# Altium PCB Circadian2-RevA.PcbDoc
Units mm, origin at the board's own origin, x right, y up, seen from the top; angles counter-clockwise.
Board outline 28 x 60 mm, 2 copper layers (Top Layer, Bottom Layer); 28 components, 27 nets, 66 pads, 0 vias.
Unrouted connection lines stored in the file: 8.
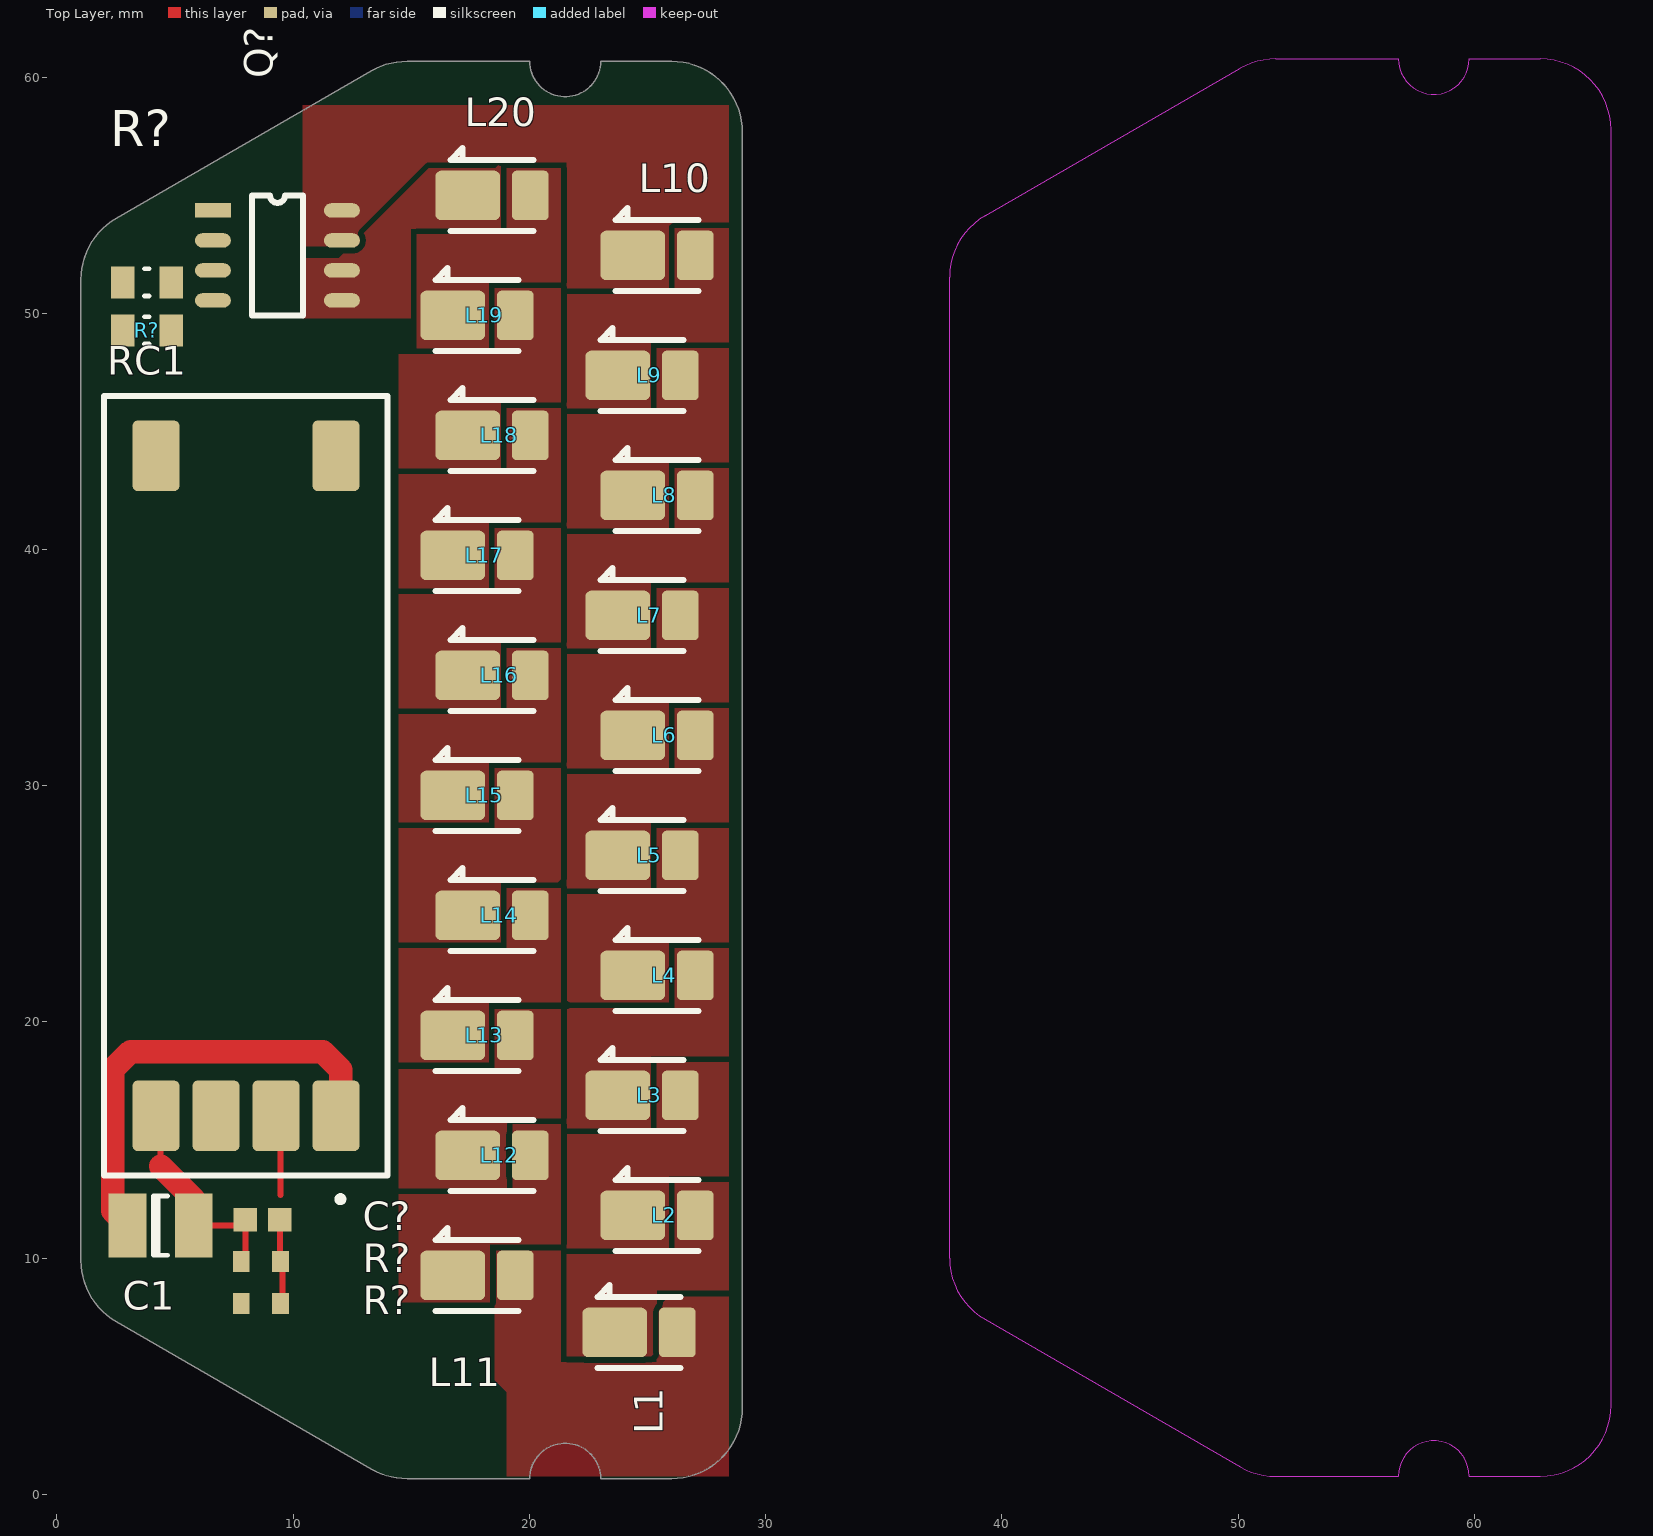
[diagram p0: Top Layer view]
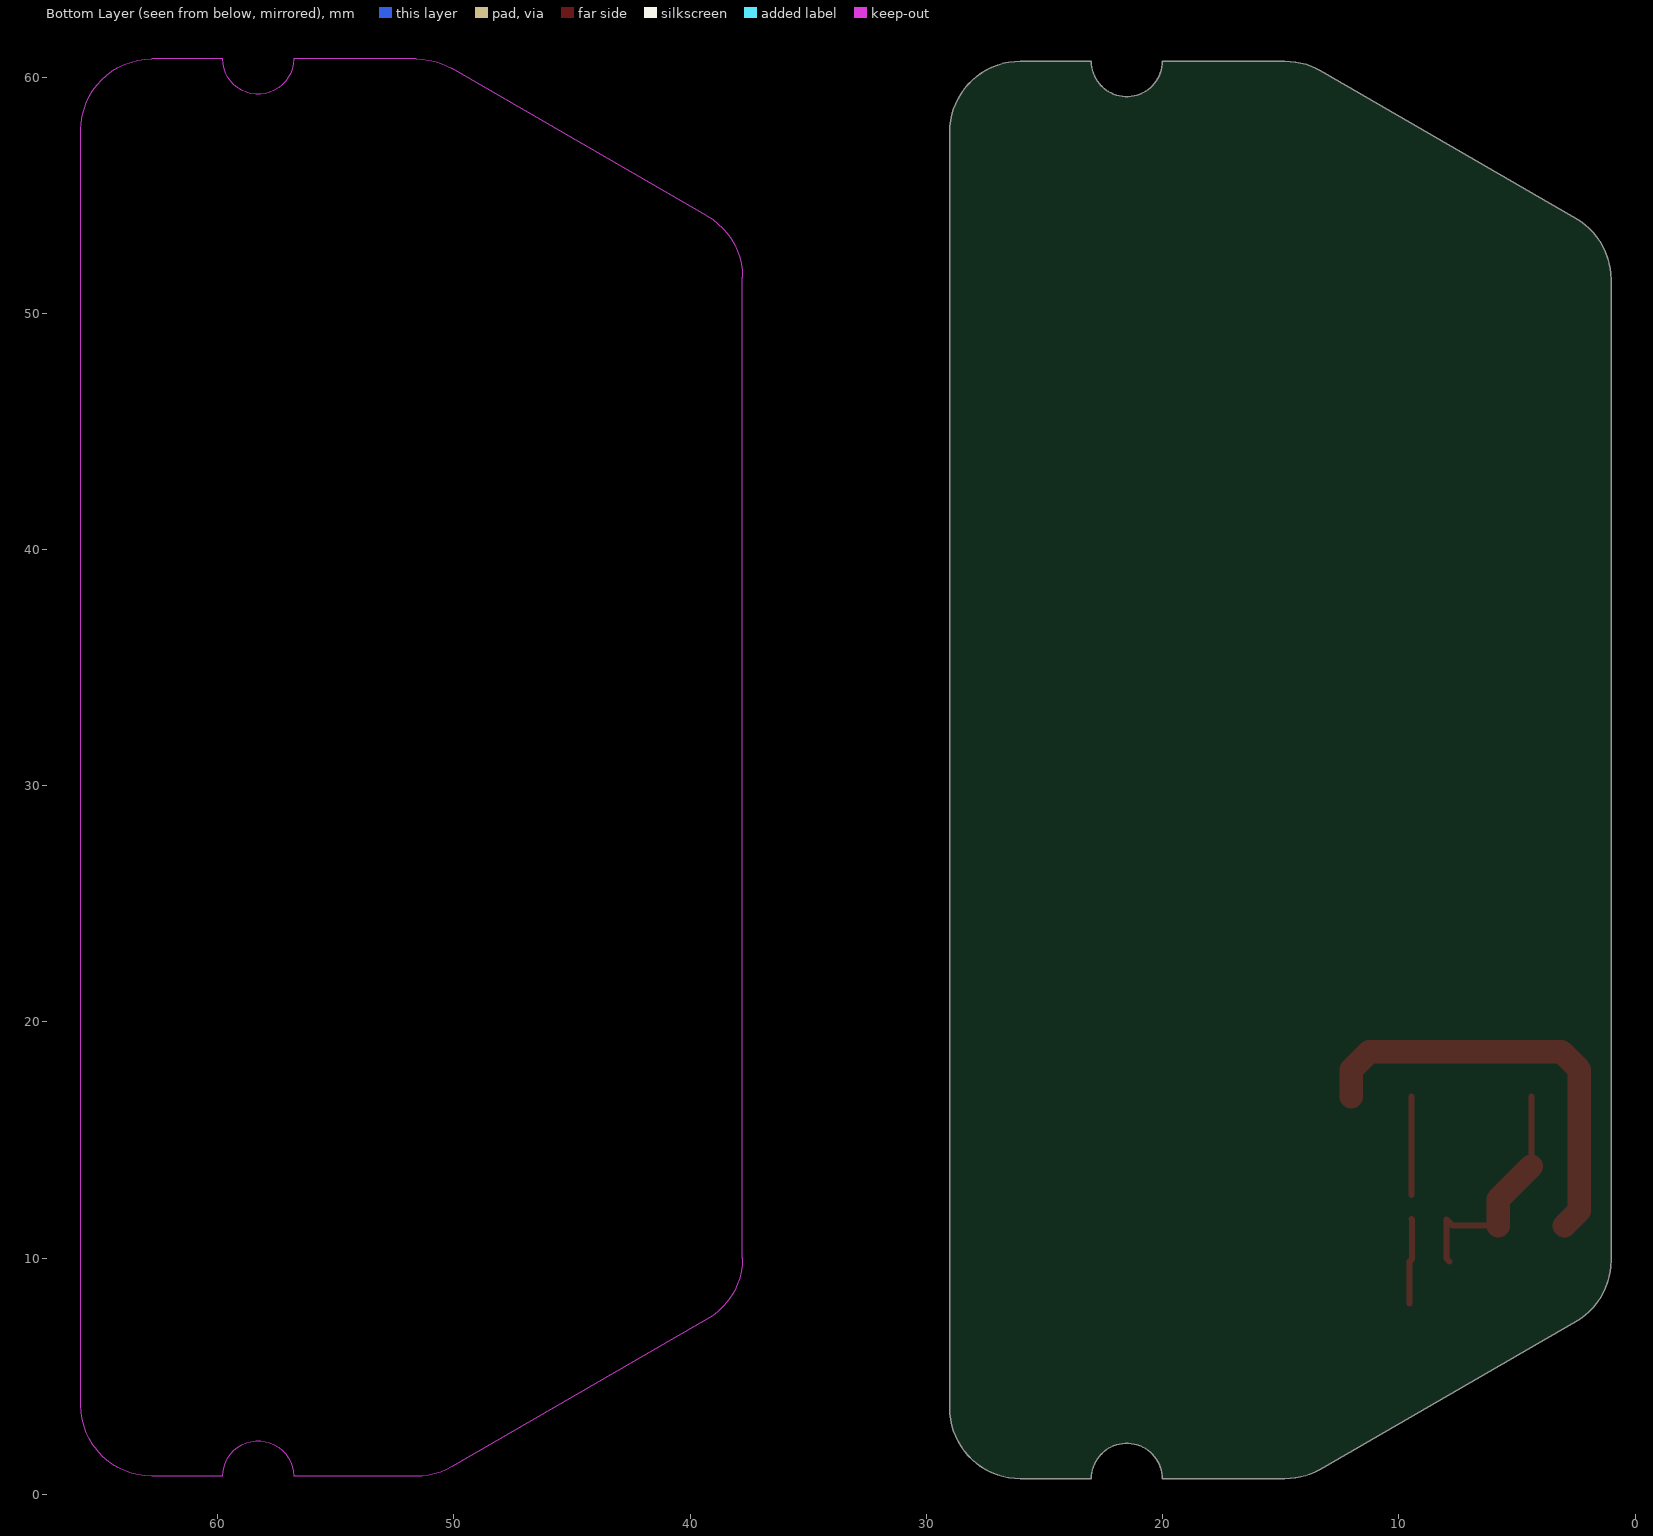
[diagram p1: Bottom Layer view, seen from below]
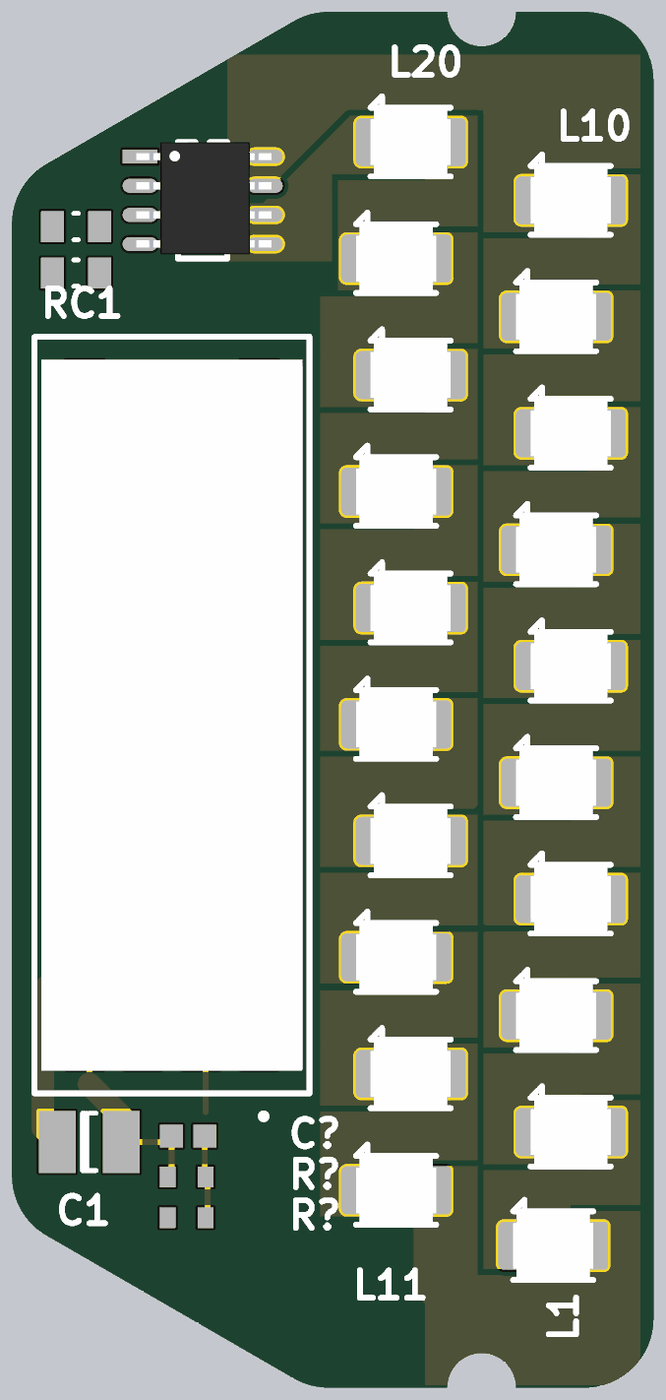
[diagram p2: 3D render of the assembled board from above, using the file's embedded part models]

## Layer stack, top to bottom
Top Solder: solder mask 0.0102, Solder Resist, Dk 3.5
Top Layer: signal copper 0.0356
Dielectric 1: dielectric 0.32, FR-4, Dk 4.8
Bottom Layer: signal copper 0.0356
Bottom Solder: solder mask 0.0102, Solder Resist, Dk 3.5

## Board outline
1.016,9.906 ccw(c4.016,9.906) 2.516,7.308 13.32,1.07 ccw(c14.82,3.668) 14.82,0.668 20.016,0.668 cw(c21.516,0.668) 23.016,0.668 26.016,0.668 ccw(c26.016,3.668) 29.016,3.668 29.016,57.668 ccw(c26.016,57.668) 26.016,60.668 23.016,60.668 cw(c21.516,60.668) 20.016,60.668 14.82,60.668 ccw(c14.82,57.668) 13.32,60.266 2.516,54.029 ccw(c4.016,51.431) 1.016,51.431

## Design rules (kind name [scope] priority, off if disabled: settings)
Clearance [All] p1: gap=0.254
PolygonConnect [All] p1: connectstyle=Direct reliefconductorwidth=0.254 reliefentries=4 polygonreliefangle="90 Angle" airgapwidth=0.254
RoutingVias [All] p1: holewidth=0.711 width=1.27 viastyle="Through Hole" minholewidth=0.711 minwidth=1.27 maxholewidth=0.711 maxwidth=1.27
SolderMaskExpansion [All] p1: expansion=0.102
Width [All] p1: maxlimit=1 minlimit=0.152 preferedwidth=0.254
30 further rules are at their usual default settings.

## Components (designator, comment, footprint, x,y, rotation, side; value= is the part's Value field where it differs from the comment)
C1 "C1210" 1210 4.387,11.382 r0 top
C? "100nF" CAP_SM0603_YAGEOCC2_N 8.705,11.636 r180 top
L1 "GW JTLPS1" E2835 24.638,6.858 r0 top
L2 "GW JTLPS1" E2835 25.4,11.811 r0 top
L3 "GW JTLPS1" E2835 24.765,16.891 r0 top
L4 "GW JTLPS1" E2835 25.4,21.971 r0 top
L5 "GW JTLPS1" E2835 24.765,27.051 r0 top
L6 "GW JTLPS1" E2835 25.4,32.131 r0 top
L7 "GW JTLPS1" E2835 24.765,37.211 r0 top
L8 "GW JTLPS1" E2835 25.4,42.291 r0 top
L9 "GW JTLPS1" E2835 24.765,47.371 r0 top
L10 "GW JTLPS1" E2835 25.4,52.451 r0 top
L11 "GW JTLPS1" E2835 17.78,9.271 r0 top
L12 "GW JTLPS1" E2835 18.415,14.351 r0 top
L13 "GW JTLPS1" E2835 17.78,19.431 r0 top
L14 "GW JTLPS1" E2835 18.415,24.511 r0 top
L15 "GW JTLPS1" E2835 17.78,29.591 r0 top
L16 "GW JTLPS1" E2835 18.415,34.671 r0 top
L17 "GW JTLPS1" E2835 17.78,39.751 r0 top
L18 "GW JTLPS1" E2835 18.415,44.831 r0 top
L19 "GW JTLPS1" E2835 17.78,49.911 r0 top
L20 "GW JTLPS1" E2835 18.415,54.991 r0 top
Q? "NSS40301" SOIC8 6.604,54.356 r0 top
R? "10R" RES_SM0805_YAGEORC_N 3.81,51.308 r0 top
R? "10R" RES_SM0603_YAGEORC_N 8.636,8.08 r180 top
R? "10R" RES_SM0603_YAGEORC_N 8.636,9.858 r0 top
R? "10R" RES_SM0805_YAGEORC_N 3.81,49.276 r0 top
RC1 "RCD-24PL_01" RCD-24PL_01 8,30 r90 top locked

## Footprints (in the part's own frame and the unit in brackets; to place one, negate y for a bottom-side part, rotate by r counter-clockwise, add the part's x,y. Pads: shape width x height; smd on the part's side, far side on the other; paste and mask are expansions set on the pad)
1210 [mm] "Chip Capacitor; Body 3.2 x 2.5 mm (LxW typ)"
  rect 1.6x2.7 smd: 1(-1.4,0) 2(1.4,0)
  silkscreen extent -0.3,-1.25 0.3,1.25
CAP_SM0603_YAGEOCC2_N [mm] "Capacitor, Yageo CC Class2, SM0603, IPC Medium Density"
  rect 1x1 smd: 1(-0.727,0) 2(0.727,0)
  body extent -0.9,-0.5 0.9,0.5, height 0.9
E2835 [mm] "E2835"
  rrect25% 2.75x2.1 smd: 1(-1.025,0)
  rrect25% 1.55x2.1 smd: 2(1.625,0)
  silkscreen extent -1.75,-1.5 1.75,2, body extent -1.75,-1.4 1.75,1.4, height 0.65
RCD-24PL_01 [mm] "Recom LED Driver"
  rrect25% 3x2 smd: 1(-13.97,-3.81) 2(-13.97,-1.27) 3(-13.97,1.27) 4(-13.97,3.81) 5(13.97,-3.81) 6(13.97,3.81)
  silkscreen extent -17.63,-6 16.5,6, body extent -15.5,-5.7 15.5,5.7, height 5.6
RES_SM0603_YAGEORC_N [mm] "Resistor, Yageo RC_L, SM0603, IPC Medium Density"
  rect 0.7x0.9 smd: 1(-0.827,0) 2(0.827,0)
  body extent -0.85,-0.45 0.85,0.45, height 0.55
RES_SM0805_YAGEORC_N [mm] "Resistor, Yageo RC_L, SM0805, IPC Medium Density"
  rect 1x1.35 smd: 1(-1.027,0) 2(1.027,0)
  silkscreen extent -0.1,-0.58 0.1,0.58, body extent -0.7,-0.67 14.39,47.92, height 0.6
SOIC8 [mil]
  rect 60x24 smd: 1(0,0)
  oval 60x24 smd: 2(0,-50) 3(0,-100) 4(0,-150) 5(215,-150) 6(215,-100) 7(215,-50) 8(215,0)
  silkscreen extent 65,-175 150,25, body extent -6,-168 226,25, height 55

## Part data
C1: "Ceramic Chip Capacitor - Standard"
C?: library part CC0603KRX7R9BB104, "CAP 100nF SM0603 X7R 50V YAGEO CC2"
L1 L2 L3 L4 L5 L6 L7 L8 L9 L10 L11 L12 L13 L14 L15 L16 L17 L18 L19 L20: library part "GW JTLPS1.CM LED", "Osram LED"
R? R?: library part RC0805FR-0710RL, "RES 10R SM0805 YAGEO RC_L"
R? R?: library part RC0603FR-0710RL, "RES 10R SM0603 YAGEO RC_L"

## Nets (pads, with @x,y where several pads share a name; then routed paths per layer and width w, separated by ;. In a path a pad name is that pad's centre, name@x,y a point inside that pad or via, vN(x,y) a via of type N, cw(c..) or ccw(c..) an arc to the next point about the centre after c; other vN are vias at no path point)
GND: C1.2 C?.2 R?.1@7.809,9.858 RC1.4 | length 10.2
  Top Layer w0.254: 4.387,13.901 RC1.4@4.387,16.843 ; C1.2 7.724,11.382 C?.2 7.978,9.981 R?.1@7.855,9.858
  Top Layer w1: 4.387,13.901 5.787,12.501 C1.2
LEDVOUT+: L1.2 L11.2 RC1.5
LEDVOUT-: R?.1@2.783,49.276 R?.1@2.783,51.308 RC1.6
NetC?_1: C?.1 R?.1@9.463,8.08 R?.2@9.463,9.858 RC1.2 | length 7.8
  Top Layer w0.254: C?.1@9.467,11.671 C?.1 9.432,9.981 9.555,9.858 R?.1@9.555,8.08 ; 9.467,12.687 RC1.2@9.467,16.843
NetL1_1: L1.1 L2.2
NetL2_1: L2.1 L3.2
NetL3_1: L3.1 L4.2
NetL4_1: L4.1 L5.2
NetL5_1: L5.1 L6.2
NetL6_1: L6.1 L7.2
NetL7_1: L7.1 L8.2
NetL8_1: L8.1 L9.2
NetL9_1: L9.1 L10.2
NetL10_1: L10.1 Q?.2 Q?.4 Q?.7 Q?.8
NetL11_1: L11.1 L12.2
NetL12_1: L12.1 L13.2
NetL13_1: L13.1 L14.2
NetL14_1: L14.1 L15.2
NetL15_1: L15.1 L16.2
NetL16_1: L16.1 L17.2
NetL17_1: L17.1 L18.2
NetL18_1: L18.1 L19.2
NetL19_1: L19.1 L20.2
NetL20_1: L20.1 Q?.5 Q?.6
NetQ?_1: Q?.1 R?.2@4.837,51.308
NetQ?_3: Q?.3 R?.2@4.837,49.276
VIN: C1.1 RC1.1 | length 18.3
  Top Layer w1: C1.1 2.355,12.014 2.355,17.986 3.117,18.748 11.245,18.748 12.007,17.986 RC1.1@12.007,16.843
pads on no net: R?.2@7.809,8.08 RC1.3

## Polygon pours and split planes (outlines as drawn)
NetL9_1 on Top Layer "Top Layer-No Net" (solid, remove dead copper, pour order 42): 21.59,45.974 25.146,45.974 25.146,48.768 28.448,48.768 28.448,53.594 26.162,53.594 26.162,50.8 21.59,50.8 21.59,45.974
NetL8_1 on Top Layer "Top Layer-No Net" (solid, remove dead copper, pour order 40): 21.59,40.894 25.908,40.894 25.908,43.688 28.448,43.688 28.448,48.514 25.4,48.514 25.4,45.72 21.59,45.72 21.59,40.894
NetL7_1 on Top Layer "Top Layer-No Net" (solid, remove dead copper, pour order 38): 21.59,35.814 25.146,35.814 25.146,38.608 28.448,38.608 28.448,43.434 26.162,43.434 26.162,40.64 21.59,40.64 21.59,35.814
NetL6_1 on Top Layer "Top Layer-No Net" (solid, remove dead copper, pour order 32): 21.59,30.734 25.908,30.734 25.908,33.528 28.448,33.528 28.448,38.354 25.4,38.354 25.4,35.56 21.59,35.56 21.59,30.734
NetL5_1 on Top Layer "Top Layer-No Net" (solid, remove dead copper, pour order 30): 21.59,25.654 25.146,25.654 25.146,28.448 28.448,28.448 28.448,33.274 26.162,33.274 26.162,30.48 21.59,30.48 21.59,25.654
NetL4_1 on Top Layer "Top Layer-No Net" (solid, remove dead copper, pour order 28): 21.59,20.828 25.908,20.828 25.908,23.368 28.448,23.368 28.448,28.194 25.4,28.194 25.4,25.4 21.59,25.4 21.59,20.828
NetL3_1 on Top Layer "Top Layer-No Net" (solid, remove dead copper, pour order 26): 21.59,15.494 25.146,15.494 25.146,18.542 28.448,18.542 28.448,23.114 26.162,23.114 26.162,20.574 21.59,20.574
NetL2_1 on Top Layer "Top Layer-No Net" (solid, remove dead copper, pour order 24): 21.59,10.414 25.908,10.414 25.908,13.462 28.448,13.462 28.448,18.288 25.4,18.288 25.4,15.24 21.59,15.24
NetL1_1 on Top Layer "Top Layer-No Net" (solid, remove dead copper, pour order 22): 21.59,5.842 21.59,10.16 26.162,10.16 26.162,13.208 28.448,13.208 28.448,8.636 25.4,8.636 25.4,5.842
NetL19_1 on Top Layer "Top Layer-No Net" (solid, remove dead copper, pour order 20): 15.24,48.514 18.288,48.514 18.288,51.308 21.336,51.308 21.336,56.134 19.05,56.134 19.05,53.34 15.24,53.34
NetL18_1 on Top Layer "Top Layer-No Net" (solid, remove dead copper, pour order 18): 14.478,43.434 18.796,43.434 18.796,46.228 21.336,46.228 21.336,51.054 18.542,51.054 18.542,48.26 14.478,48.26
NetL17_1 on Top Layer "Top Layer-No Net" (solid, remove dead copper, pour order 16): 14.478,38.354 18.288,38.354 18.288,41.148 21.336,41.148 21.336,45.974 19.05,45.974 19.05,43.18 14.478,43.18
NetL16_1 on Top Layer "Top Layer-No Net" (solid, remove dead copper, pour order 14): 14.478,33.274 14.478,38.1 18.542,38.1 18.542,40.894 20.32,40.894 21.336,40.894 21.336,36.068 18.796,36.068 18.796,33.274
NetL15_1 on Top Layer "Top Layer-No Net" (solid, remove dead copper, pour order 12): 14.478,28.448 18.288,28.448 18.288,30.988 21.336,30.988 21.336,35.814 19.05,35.814 19.05,33.02 14.478,33.02
NetL14_1 on Top Layer "Top Layer-No Net" (solid, remove dead copper, pour order 10): 14.478,23.368 14.478,28.194 18.542,28.194 18.542,30.734 21.336,30.734 21.336,25.908 18.796,25.908 18.796,23.368
NetL13_1 on Top Layer "Top Layer-No Net" (solid, remove dead copper, pour order 4): 14.478,18.288 18.288,18.288 18.288,20.828 21.336,20.828 21.336,25.654 19.05,25.654 19.05,23.114 14.478,23.114
NetL12_1 on Top Layer "Top Layer-No Net" (solid, remove dead copper, pour order 2): 14.478,17.997 18.542,17.997 18.542,20.537 21.336,20.537 21.336,15.711 19.05,15.711 19.05,12.936 17.018,12.936 14.478,12.936
NetL11_1 on Top Layer "NetL11_1" (solid, remove dead copper, pour order 0): 14.478,8.128 14.478,12.7 19.304,12.7 19.304,15.665 21.336,15.665 21.336,10.585 18.327,10.585 18.327,9.95 18.327,8.128 17.78,8.128
NetL20_1 on Top Layer "Top Layer-No Net" (solid, pour order 46): 18.796,53.589 18.796,56.383 18.547,56.134 15.748,56.134 11.938,52.324 10.414,52.324 10.414,49.784 14.986,49.784 14.986,53.589
NetL10_1 on Top Layer "Top Layer-No Net" (solid, pour order 48): 21.839,50.925 25.903,50.925 25.903,53.719 28.443,53.719 28.443,58.799 10.414,58.799 10.414,52.832 12.7,52.832 16.256,56.388 21.585,56.388 21.585,50.925
LEDVOUT+ on Top Layer "Top Layer-No Net" (solid, pour order 50): 18.542,10.414 21.336,10.414 21.336,5.588 25.4,5.588 25.4,7.874 25.908,8.382 28.448,8.382 28.448,0.762 19.05,0.762 19.05,4.318 18.542,4.826

## Keep-outs
Keep-Out Layer:
  lines w0.013: 37.789,10.006 ccw(c40.789,10.006) 39.289,7.408 50.093,1.17 ccw(c51.593,3.768) 51.593,0.768 56.789,0.768 cw(c58.289,0.768) 59.789,0.768 62.789,0.768 ccw(c62.789,3.768) 65.789,3.768 65.789,57.768 ccw(c62.789,57.768) 62.789,60.768 59.789,60.768 cw(c58.289,60.768) 56.789,60.768 51.593,60.768 ccw(c51.593,57.768) 50.093,60.366 39.289,54.129 ccw(c40.789,51.531) 37.789,51.531 37.789,10.006